# EAGLE board PlytkaProcesor (EAGLE 9.7.0)
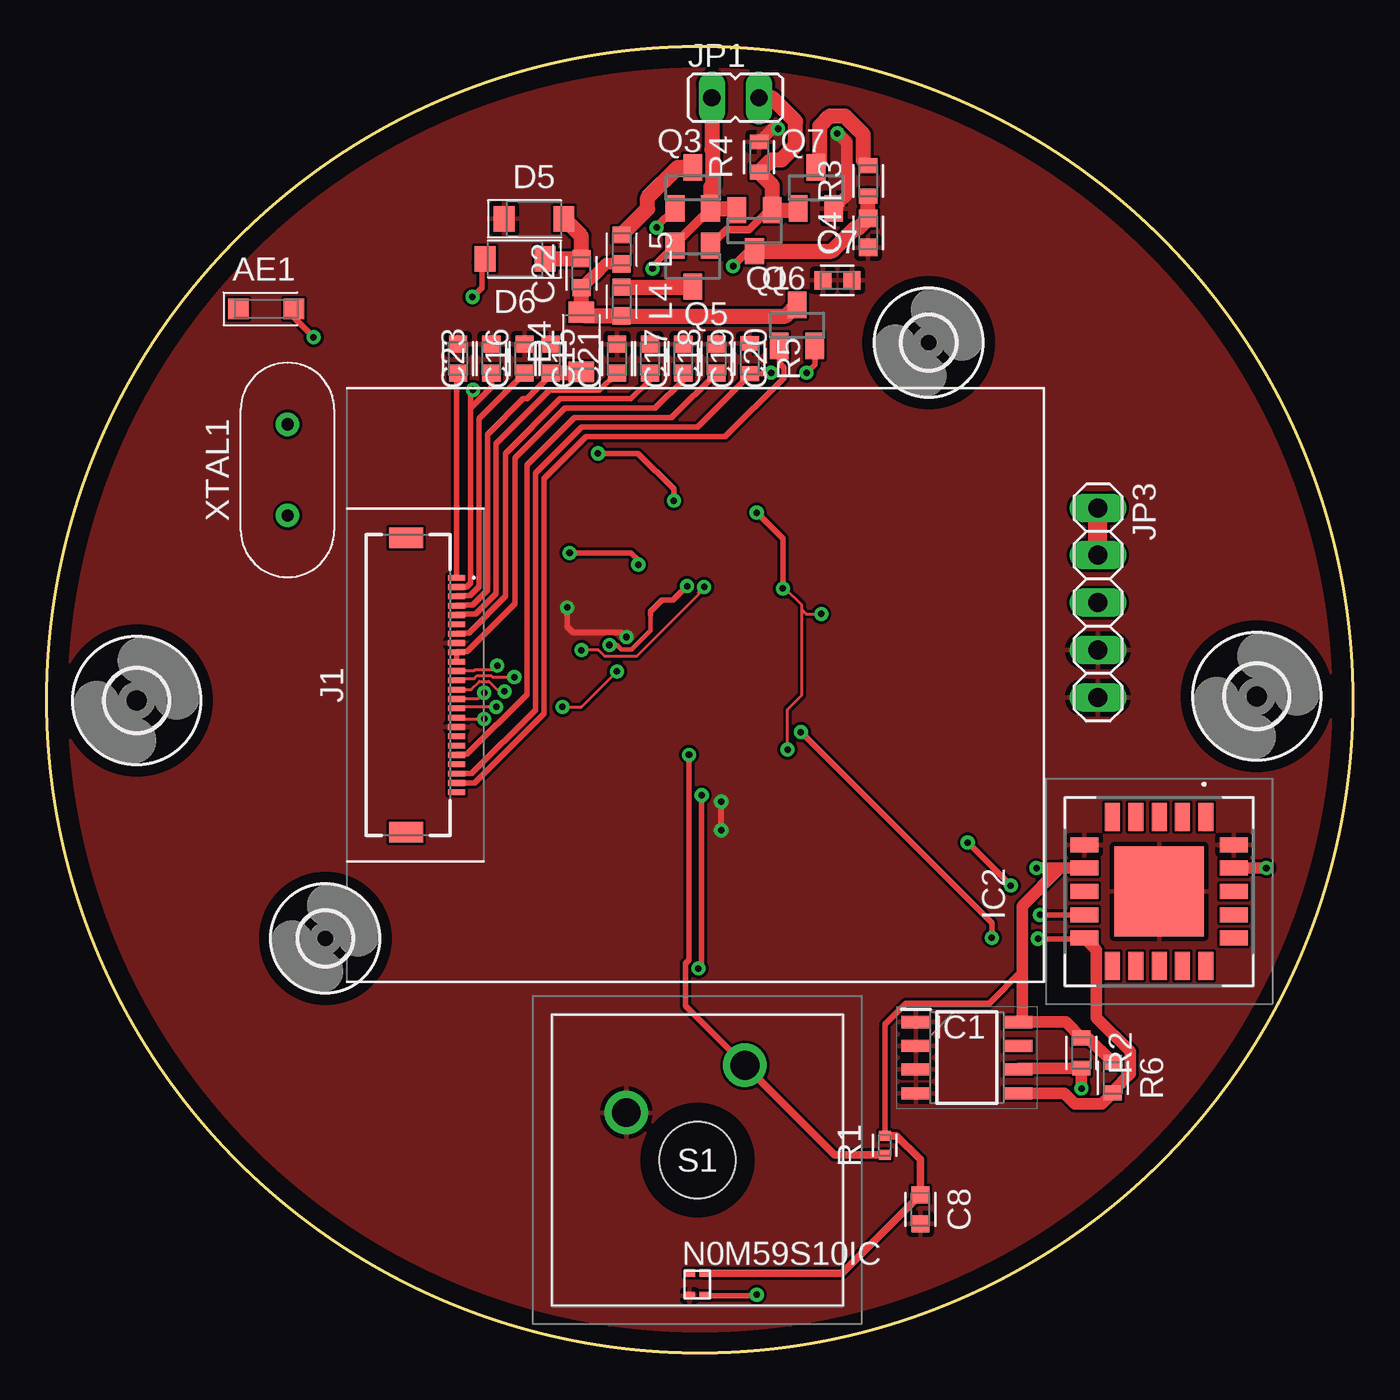
[diagram p0: board, top side]
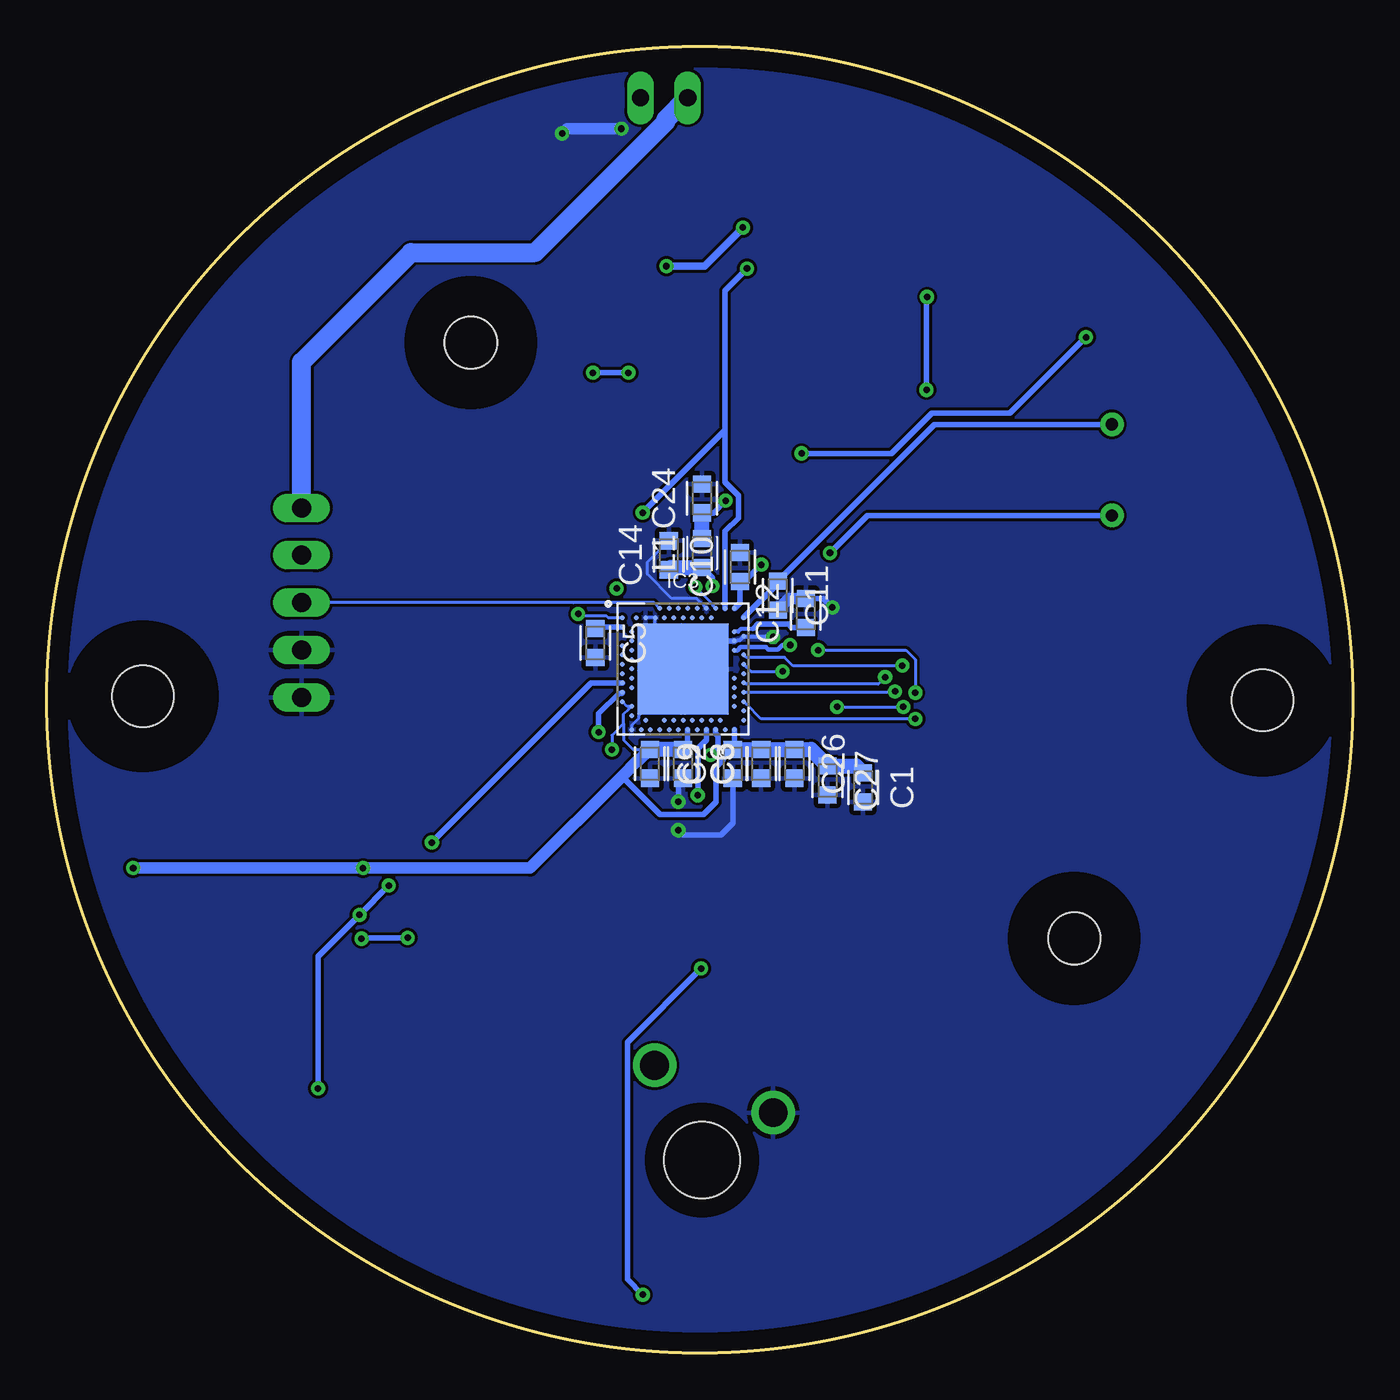
[diagram p1: board, bottom side, seen from below]

Size 70 x 70 mm. Coordinates in mm from the lower left corner, seen from the top.
Outline: circle at 35,35 radius 35
Copper layers (1*16): Top 0.035mm / dielectric 1.5mm / Bottom 0.035mm
Design rules "default": minimum track width 6mil, minimum drill 0.35mm, track to track 6mil, track to pad 6mil, pad to pad 6mil, via to via 6mil, smd to smd 6mil, copper to edge 40mil, drill to drill 6mil, minimum pad ring 10mil, minimum via ring 8mil, stop-mask expansion 4mil, vias tented up to drill 0mil, thermal gap 10mil

## Footprints (pad centres in the part's own frame; a part is rotated, then mirrored left to right if it is on the bottom)
ANT-GPS-3.2X1MM = smd 1.1 x 1.112: 1 -1.485,0; 2 1.485,0
CAPC1608X85 = smd 0.921 x 0.97: 1 -0.775,0; 2 0.775,0
SODFL3718X115 = smd 1.115 x 1.361: 1 -1.6,0; 2 1.6,0
3,3 = hole 3.3: 0,0
2,8 = hole 2.8: 0,0
SOIC127P602X173-8N = smd 1.551 x 0.65: 1 -2.725,1.905; 2 -2.725,0.635; 3 -2.725,-0.635; 4 -2.725,-1.905; 5 2.725,-1.905; 6 2.725,-0.635; 7 2.725,0.635; 8 2.725,1.905
SCD40DR1 = smd 1.5 x 0.8: 1 -4,2.5; 2 -4,1.25; 3 -4,0; 4 -4,-1.25; 5 -4,-2.5; 11 4,-2.5; 12 4,-1.25; 13 4,0; 14 4,1.25; 15 4,2.5 | smd 0.8 x 1.5: 6 -2.5,-4; 7 -1.25,-4; 8 0,-4; 9 1.25,-4; 10 2.5,-4; 16 2.5,4; 17 1.25,4; 18 0,4; 19 -1.25,4; 20 -2.5,4 | smd 4.8 x 4.8: 21 0,0
NRF52840-QIAA = smd 4.85 x 4.85: 74 0,0 | smd 0.275 x 0.275: A8 -1.25,3.25; A10 -0.75,3.25; A12 -0.25,3.25; A14 0.25,3.25; A16 0.75,3.25; A18 1.25,3.25; A20 1.75,3.25; A22 2.25,3.25; A23 2.75,3.25; AA24 3.25,-2.25; AB2 -2.75,-2.5; AC5 -2,-2.75; AC9 -1,-2.75; AC11 -0.5,-2.75; AC13 0,-2.75; AC15 0.5,-2.75; AC17 1,-2.75; AC19 1.5,-2.75; AC21 2,-2.75; AC24 3.25,-2.75; AD2 -2.75,-3.25; AD4 -2.25,-3.25; AD6 -1.75,-3.25; AD8 -1.25,-3.25; AD10 -0.75,-3.25; AD12 -0.25,-3.25; AD14 0.25,-3.25; AD16 0.75,-3.25; AD18 1.25,-3.25; AD20 1.75,-3.25; AD22 2.25,-3.25; AD23 2.75,-3.25; B1 -3.25,2.75; B3 -2.5,2.75; B5 -2,2.75; B7 -1.5,2.75; B9 -1,2.75; B11 -0.5,2.75; B13 0,2.75; B15 0.5,2.75; B17 1,2.75; B19 1.5,2.75; B24 3.25,2.75; C1 -3.25,2.25; D2 -2.75,2; D23 2.75,2; E24 3.25,1.75; F2 -2.75,1.5; F23 2.75,1.5; G1 -3.25,1.25; H2 -2.75,1; H23 2.75,1; J1 -3.25,0.75; J24 3.25,0.75; K2 -2.75,0.5; L1 -3.25,0.25; L24 3.25,0.25; M2 -2.75,0; N1 -3.25,-0.25; N24 3.25,-0.25; P2 -2.75,-0.5; P23 2.75,-0.5; R1 -3.25,-0.75; R24 3.25,-0.75; T2 -2.75,-1; T23 2.75,-1; U1 -3.25,-1.25; U24 3.25,-1.25; V23 2.75,-1.5; W1 -3.25,-1.75; W24 3.25,-1.75; Y2 -2.75,-2; Y23 2.75,-2
F34G1A7Q1E8C24 = smd 0.3 x 0.9: 1 -5.75,2.425; 2 -5.25,2.425; 3 -4.75,2.425; 4 -4.25,2.425; 5 -3.75,2.425; 6 -3.25,2.425; 7 -2.75,2.425; 8 -2.25,2.425; 9 -1.75,2.425; 10 -1.25,2.425; 11 -0.75,2.425; 12 -0.25,2.425; 13 0.25,2.425; 14 0.75,2.425; 15 1.25,2.425; 16 1.75,2.425; 17 2.25,2.425; 18 2.75,2.425; 19 3.25,2.425; 20 3.75,2.425; 21 4.25,2.425; 22 4.75,2.425; 23 5.25,2.425; 24 5.75,2.425 | smd 1.1 x 1.8: MP1 -7.9,-0.275; MP2 7.9,-0.275
JP1 = drill 0.914 long: 1 0,-1.27; 2 0,1.27
1X05 = drill 1.016 long: 1 -5.08,0; 2 -2.54,0; 3 0,0; 4 2.54,0; 5 5.08,0
INDC1608X95N = smd 0.9 x 0.97: 1 -0.785,0 | smd 0.933 x 0.97: 2 0.769,0
SOT23 = smd 1 x 1.4: 1 -0.95,-1.1; 2 0.95,-1.1; 3 0,1.1
RESC1005X40 = smd 0.535 x 0.644: 1 -0.507,0; 2 0.507,0
RESC1608X60 = smd 0.799 x 0.974: 1 -0.815,0; 2 0.815,0
MX1AC1NN = drill 1.549 pad 2.324: 1 0,0; 2 6.35,2.54 | hole 4.089: 3.81,-2.54
N0M59S10IC = smd 0.55 x 0.4: DIN 1.15,0.2; DOUT 0.34,1.4; VDD 1.15,1.4; VSS 0.34,0.2
XTALRR488W45L1150T500H350B = drill 0.657 pad 1.257: 1 -2.44,0; 2 2.44,0

## Placement (x,y rotation side)
AE1  AH316  [ANT-GPS-3.2X1MM]  11.77,55.95 0 top
C1  4.7uF  [CAPC1608X85]  26.24,30.3 270 bottom
C2  4.7uF/25V  [CAPC1608X85]  33.23,31.57 90 bottom
C3  100nF/25V  [CAPC1608X85]  31.71,31.57 90 bottom
C4  100nF/25V  [CAPC1608X85]  44.02,60.02 90 top
C5  100nF  [CAPC1608X85]  40.6,38.04 270 bottom
C6  1uF  [CAPC1608X85]  35.9,31.57 270 bottom
C7  1uF  [CAPC1608X85]  42.37,57.48 0 top
C8  0.1uF  [CAPC1608X85]  46.82,7.69 270 top
C9  100nF  [CAPC1608X85]  37.67,31.57 270 bottom
C10  12pF  [CAPC1608X85]  32.85,42.11 90 bottom
C11  12pF  [CAPC1608X85]  30.82,40.58 270 bottom
C12  100pF  [CAPC1608X85]  29.32,39.64 90 bottom
C14  0.8pF  [CAPC1608X85]  36.66,42.74 90 bottom
C15  1uF/25V  [CAPC1608X85]  25.61,53.28 270 top
C16  1uF/25V  [CAPC1608X85]  22.05,53.28 270 top
C17  1uF/25V  [CAPC1608X85]  30.56,53.28 270 top
C18  1uF/25V  [CAPC1608X85]  32.34,53.28 270 top
C19  1uF/25V  [CAPC1608X85]  34.12,53.28 270 top
C20  1uF/25V  [CAPC1608X85]  35.9,53.28 270 top
C21  4.7uF/25V  [CAPC1608X85]  27.01,53.28 270 top
C22  4.7uF/25V  [CAPC1608X85]  28.66,57.86 90 top
C23  1uF/25V  [CAPC1608X85]  23.83,53.28 90 top
C24  0.5pF  [CAPC1608X85]  34.88,45.79 90 bottom
C26  100nF  [CAPC1608X85]  29.93,31.57 270 bottom
C27  100nF  [CAPC1608X85]  28.15,30.68 270 bottom
D4  MBR0520LT1G  [SODFL3718X115]  28.66,54.17 90 top
D5  MBR0520LT1G  [SODFL3718X115]  26.12,60.78 0 top
D6  MBR0520LT1G  [SODFL3718X115]  25.1,58.62 180 top
H1  MOUNT-HOLE3.3  [3,3]  4.83,34.97 0 top
H2  MOUNT-HOLE3.3  [3,3]  64.85,35.19 0 top
H3  MOUNT-HOLE2.8  [2,8]  14.93,22.21 0 top
H4  MOUNT-HOLE2.8  [2,8]  47.27,54.14 0 top
IC1  FM24CL64B-GTR  [SOIC127P602X173-8N]  49.31,15.82 0 top
IC2  SCD40-D-R1  [SCD40DR1]  59.62,24.73 270 top
IC3  NRF52840-QIAA-R  [NRF52840-QIAA]  35.9,36.65 0 bottom
J1  F34G-1A7Q1-E8C24  [F34G1A7Q1E8C24]  19.54,35.79 270 top
JP1  [JP1]  36.91,67.25 270 top
JP3  PINHD-1X5  [1X05]  56.34,40.2 270 top
L1  4.7nH  [INDC1608X95N]  34.88,42.87 90 bottom
L4  10uH  [INDC1608X95N]  30.82,56.33 270 top
L5  47uH  [INDC1608X95N]  30.82,59.13 270 top
Q1  PMOSFET  [SOT23]  37.93,60.14 180 top
Q3  PMOSFET  [SOT23]  34.63,62.43 0 top
Q5  PMOSFET  [SOT23]  34.63,58.24 180 top
Q6  NMOSFET  [SOT23]  40.22,55.06 0 top
Q7  NMOSFET  [SOT23]  41.23,62.43 0 top
R1  4k7  [RESC1005X40]  44.91,11.12 90 top
R2  10k  [RESC1608X60]  55.45,16.07 270 top
R3  33K  [RESC1608X60]  44.02,62.81 90 top
R4  33K  [RESC1608X60]  38.18,64.08 90 top
R5  0.47R  [RESC1608X60]  37.67,53.28 270 top
R6  10k  [RESC1608X60]  57.14,14.74 270 top
S1  MX1A-C1NN  [MX1AC1NN]  31.06,12.87 0 top
U$1  N0M59S10IC  [N0M59S10IC]  34.12,2.87 0 top
XTAL1  HC49  [XTALRR488W45L1150T500H350B]  12.91,47.32 90 top

## Library data of the parts
AE1 = RF_Wireless; CATEGORY: Antenna; DESCRIPTION: Antenna SURF MOUNT ANTENNA RADIEDGE; MANUFACTURER: Taiyo Yuden; MPN: AH316M245001-T; OPERATING_TEMPERATURE: - 40 C to +85 C; ROHS_COMPLIANT: COMPLIANT; SERIES: AH; SUB_CATEGORY: Antenna; TYPE: 2.4GHz Antenna - 2.4GHz, 5GHz, Bluetooth, WiFi, WLAN, Zigbee
C1-C12 C14-C24 C26 C27 = Capacitor; CATEGORY: Capacitor
D4-D6 = Diode; CATEGORY: Diode; DESCRIPTION: DIODE SCHOTTKY 20V 500MA SOD123; MANUFACTURER: ON Semiconductor; MPN: MBR0520LT1G; SUB-CATEGORY: Schottky
H1-H4 = holes
IC1 = SamacSys_Parts; DESCRIPTION: CYPRESS - INFINEON TECHNOLOGIES - FM24CL64B-GTR - Ferroelectric RAM (FRAM), 64 Kbit (8K x 8) I2C, 1 MHz, 2.7 V to 3.65 V Supply, SOIC-8; HEIGHT: 1.727mm; MANUFACTURER_NAME: Infineon; MANUFACTURER_PART_NUMBER: FM24CL64B-GTR; MOUSER_PART_NUMBER: 877-FM24CL64B-GTR; MOUSER_PRICE-STOCK: https://www.mouser.co.uk/ProductDetail/Infineon-Technologies/FM24CL64B-GTR?qs=pA5MXup5wxFBNKAQkjzmOA%3D%3D
IC2 = SamacSys_Parts; DESCRIPTION: Breaking the size barrier in CO2 sensing; HEIGHT: 6.8mm; MANUFACTURER_NAME: Sensirion; MANUFACTURER_PART_NUMBER: SCD40-D-R1; MOUSER_PART_NUMBER: 403-SCD40-D-R1; MOUSER_PRICE-STOCK: https://www.mouser.co.uk/ProductDetail/Sensirion/SCD40-D-R1?qs=HBWAp0VN4RjvSDpwiC%2F4pQ%3D%3D
IC3 = IC_Wireless-RF; CATEGORY: IC_Wireless-RF; DESCRIPTION: Bluetooth ® 5, IEEE 802.15.4-2006, 2.4 GHz transceiver; FREQUENCY: 64MHz; IO: 48; MANUFACTURER: Nordic Semiconductor; MPN: nRF52840-QIAA-R; PART_STATUS: Active; ROHS_COMPLIANT: COMPLIANT; SERIES: nRF52840; SUB-CATEGORY: Bluetooth
J1 = Biblioteka; DESCRIPTION: 24 Position FPC Connector Contacts, Bottom 0.020" (0.50mm) Surface Mount, Right Angle; HEIGHT: 1.75mm; MANUFACTURER_NAME: Amphenol; MANUFACTURER_PART_NUMBER: F34G-1A7Q1-E8C24; MOUSER_PART_NUMBER: 649-F34G1A7Q1E8C24; MOUSER_PRICE-STOCK: https://www.mouser.co.uk/ProductDetail/Amphenol-Aorora/F34G-1A7Q1-E8C24?qs=11PymoJGorK92cO6qHcfCw%3D%3D
JP1 = jumper
JP3 = Connector; CATEGORY: Headers; DESCRIPTION: Header, Straight, 5 Position; MANUFACTURER: Generic; MPN: Generic; OPERATING_TEMPERATURE: Generic; PART_STATUS: Active; PITCH: 0.100" (2.54mm); ROHS_COMPLIANCE: Generic; SERIES: Generic; SUB-CATEGORY: Headers, Male Pins; TYPE: Board to Board or Cable, Unshrouded, Through Hole, Straight
L1 L4 L5 = Inductor; CATEGORY: Inductor; SUB-CATEGORY: Fixed
Q1 Q3 Q5 = Transistor; CATEGORY: Transistor; SUB-CATEGORY: MOSFET; TYPE: P-Channel
Q6 Q7 = Transistor; CATEGORY: Transistor; SUB-CATEGORY: MOSFET; TYPE: N-Channel
R1-R6 = Resistor; CATEGORY: Resistor; SUB-CATEGORY: Fixed
S1 = SamacSys_Parts; DESCRIPTION: Pushbutton Switches Full Travel, Mech. Keyswitch Tactile Feel (Clear stem), 65cN No LED, No Diode Frame Mount (no fixation pins); HEIGHT: 15.2mm; MANUFACTURER_NAME: Cherry; MANUFACTURER_PART_NUMBER: MX1A-C1NN; MOUSER_PART_NUMBER: 540-MX1A-C1NN; MOUSER_PRICE-STOCK: https://www.mouser.co.uk/ProductDetail/CHERRY/MX1A-C1NN?qs=Z9t1pRjfOcwvorA009Lo0w%3D%3D
U$1 = N0M59S10IC
XTAL1 = Frequency-Source; CATEGORY: Frequency-Source; SUB-CATEGORY: Crystal-2Pin

## Nets
3V3: C1.1 C2.2 C3.2 C6.1 C8.1 C9.1 C26.1 C27.1 IC1.8 IC2.7 IC2.19 IC3.A22 IC3.AD14 IC3.AD23 IC3.B1 IC3.W1 IC3.Y2 JP1.1 JP3.1 JP3.2 Q1.2 Q3.2 Q5.2 R1.2 R2.1 R6.1 U$1.VDD
BUSY: IC3.W24 J1.16
CS: IC3.U24 J1.13
D0: IC3.AD20 R1.1 S1.2
D1: IC3.A8 JP3.3
D2: IC3.AD18 U$1.DIN
D/C: IC3.A20 J1.14
DCC: IC3.B3
DCCH: IC3.AB2
DEC5: IC3.N24
DECUSB: IC3.AC5
GND: C1.2 C2.1 C3.1 C4.1 C5.2 C6.2 C7.1 C7.2 C8.2 C9.2 C10.2 C11.2 C12.2 C14.2 C15.1 C16.1 C17.1 C18.1 C19.1 C20.1 C21.1 C23.2 C24.2 C26.2 C27.2 D5.1 IC1.1 IC1.2 IC1.3 IC1.4 IC2.6 IC2.20 IC2.21 IC3.74 IC3.A18 IC3.AD2 IC3.B5 IC3.B7 IC3.E24 IC3.F23 J1.8 J1.17 JP3.4 JP3.5 Q7.2 R4.2 R5.1 S1.1 U$1.VSS
INDUCTOR_SEL: JP1.2 Q1.1 Q5.1 Q7.1 R4.1
L1: L5.1 Q3.3
L2: L4.1 Q5.3
MISO: IC3.P2
MOSI: IC3.J24 J1.11
N$3: C11.1 IC3.B24 XTAL1.2
N$4: C4.2 Q1.3 Q3.1 R3.1
N$5: C16.2 J1.1
N$6: C15.2 J1.3
N$7: C17.2 J1.5
N$8: C18.2 J1.7
N$9: C10.1 IC3.A23 XTAL1.1
N$10: C19.2 J1.9 J1.10
N$11: Q7.3 R3.2
N$12: C20.2 J1.20
N$13: J1.23 Q6.1
N$14: J1.22 Q6.2 R5.2
N$15: C21.2 D4.1 J1.4
N$16: C22.1 D4.2 L4.2 L5.2 Q6.3
N$17: C22.2 D5.2 D6.1
N$18: C14.1 IC3.H23 L1.1
N$19: C12.1 IC3.D23
N$20: AE1.2 C24.1 L1.2
N$22: C5.1 IC3.C1
RST: IC3.L24 J1.15
SCK: IC3.R24 J1.12
SCL: IC1.6 IC2.9 IC3.R1 R2.2
SDA: IC1.5 IC2.10 IC3.U1 R6.2
VGL: C23.1 D6.2 J1.2
VPP: J1.6

## Tracks (layer width: path | path; a pad name or v marks a point on that pad's centre or on a via)
3V3  (via drill 0.35, 0.35 pad 0.5)
  Top 0.152: v39.71,32.33 39.71,34.49 40.47,35.25 40.47,39.82 | 40.47,39.82 40.47,40.08 39.58,40.97 v39.45,40.97 | 40.47,39.82 40.69,39.6 v41.51,39.6
  Top 0.305: v38.06,45.03 39.45,43.63 v39.45,40.97 | v32.47,58.11 32.47,58.22 33.68,59.43 | 52.29,20.52 50.51,18.74 46.06,18.74 44.91,17.6 R1.2
  Top 0.406: R1.2 45.55,11.63 46.82,10.36 C8.1 42.62,4.27 U$1.VDD
  Top 0.508: Q3.2 33.68,59.43 Q5.2
  Top 0.61: R6.1 55.8,16.89 R2.1 54.62,17.72 IC1.8 52.29,17.98 52.29,20.52 52.29,23.96 54.31,25.98 IC2.7 v53.05,25.98 v53.04,25.98 | v65.36,25.98 IC2.19
  Top 0.813: Q1.2 36.89,61.33 Q3.2 35.58,62.49 35.69,62.6 35.69,64.46 35.64,64.5 JP1.1
  Top 1.016: JP3.2 JP3.1
  Bottom 0.152: IC3.W1 38.9,34.65 IC3.Y2 38.78,34.51 38.8,34.51 39.07,34.24 39.07,33.73 | 39.07,33.73 39.07,32.84 38.58,32.34 C9.1 | 39.07,33.73 39.71,33.09 v39.71,32.33 | IC3.B1 39.91,39.4 40.02,39.51 41.42,39.51 v41.51,39.6
  Bottom 0.305: IC3.AD23 33.15,32.43 C2.2 33.74,31.83 33.74,31.77 34.12,31.39 34.12,29.54 34.8,28.85 37.12,28.85 39.16,30.9 | IC3.AD14 35.65,32.59 C6.1 | v38.06,45.03 33.65,49.44 | 33.65,49.44 33.65,56.93 v32.47,58.11 | IC3.A22 33.65,40.6 33.64,40.61 33.64,44.04 32.93,44.75 32.93,45.95 33.65,46.67 33.65,49.44
  Bottom 0.61: C9.1 38.31,31.71 38.35,31.71 39.16,30.9 44.08,25.98 v53.05,25.98 v65.36,25.98
  Bottom 0.813: C1.1 26.63,31.45 C27.1 29.04,32.34 C26.1 C3.2 C2.2 | C6.1 C9.1
  Bottom 1.016: JP3.1 56.34,53.09 50.48,58.96 43.82,58.96 36.81,65.98 36.81,66.09 JP1.1
BUSY  (via drill 0.35)
  Top 0.152: J1.16 22.03,33.98 v23.44,33.98 v23.44,33.97
  Bottom 0.152: IC3.W24 32.51,34.76 32.49,34.76 31.71,33.98 23.45,33.98 v23.44,33.97
CS  (via drill 0.35)
  Top 0.152: v24.54,35.45 24.24,35.45 23.7,35.98 23.2,35.98 22.76,35.54 J1.13
  Bottom 0.152: v24.54,35.45 24.59,35.4 IC3.U24
D0  (via drill 0.35)
  Top 0.305: v34.42,32.05 34.42,21.06 34.25,20.88 34.25,18.58 37.53,15.3
  Top 0.406: R1.1 42.22,10.61 37.53,15.3 S1.2
  Bottom 0.305: IC3.AD20 34.15,33.2 34.02,33.07 34.02,32.35 34.32,32.05 v34.42,32.05
D1
  Bottom 0.152: JP3.3 41.77,40.2 37.45,40.2 IC3.A8
D2  (via drill 0.35)
  Top 0.305: v35.11,29.89 35.11,20.78 v34.93,20.6 | v38.06,3.12 38,3.07 U$1.DIN
  Bottom 0.305: IC3.AD18 34.65,32.86 35.11,32.4 v35.11,29.89 | v34.93,20.6 38.88,16.65 38.88,3.94 v38.06,3.12
D/C  (via drill 0.35 pad 0.5)
  Top 0.152: v23.45,35.38 23.11,35.04 J1.14 | v28.66,37.66 29.57,37.66 29.91,37.33 31.62,37.33 34.93,40.64 34.93,40.74 v35.23,41.04
  Bottom 0.152: IC3.A20 34.28,40.03 34.28,40.09 v35.23,41.04 | v28.66,37.66 23.96,37.66 23.45,37.16 v23.45,35.38
GND  (via drill 0.35)
  Top 0.203: v31.07,38.36 30.82,38.62
  Top 0.305: v27.9,39.95 27.9,38.93 28.21,38.62 30.82,38.62 | v36.15,29.54 v36.15,28.01
  Top 0.61: v42.37,65.35 42.88,64.84 42.88,62.03 Q7.2 | R4.2 38.66,65.37 38.67,65.37 38.9,65.6 v39.2,65.6
  Bottom 0.152: 34.25,38.17 35.83,36.58 | 35.83,36.58 38.28,34.14 38.28,34 38.65,33.63 IC3.AD2 | 35.83,36.58 37.4,38.15 IC3.B7 IC3.B5 | IC3.A18 34.78,40.03 34.78,40.05 35.17,40.43 36.51,40.43 37.8,41.73 37.8,42.38 C14.2
  Bottom 0.203: IC3.F23 33.02,38.15 32.98,38.2 32.85,38.2 IC3.E24 31.45,38.4 31.41,38.36 v31.07,38.36
  Bottom 0.305: IC3.F23 34.22,38.15 34.25,38.17 | C12.2 28.37,40.42 v27.9,39.95 | C6.2 36.15,30.54 v36.15,29.54 | v36.15,28.01 35.9,27.76 33.87,27.76 33.23,28.39 C2.1
  Bottom 0.61: C12.2 30.21,40.42 C11.2 | v42.37,65.35 42.12,65.6 v39.2,65.6
  pour Bottom: -0.48,-0.11 70.11,-0.11 70.11,69.97 -0.48,69.97
  pour Top: 70.11,-0.11 70.11,69.97 -0.48,69.97 -0.48,-0.11
INDUCTOR_SEL
  Top 0.406: Q5.1 36.43,60.19 37.63,60.19 38.68,61.24 Q1.1
  Top 0.813: Q7.1 40.2,61.24 Q1.1 38.88,62.57 R4.1 38.86,63.94 39.39,63.94 40.14,64.69 40.14,65.99 38.87,67.25 JP1.2
L1
  Top 0.813: L5.1 32.21,61.31 32.21,61.92 33.82,63.53 Q3.3
L2
  Top 0.813: L4.1 34.61,57.12 Q5.3
MOSI  (via drill 0.35 pad 0.5)
  Top 0.152: v24.14,36.83 23.91,36.59 22.95,36.59 22.89,36.54 J1.11
  Bottom 0.152: IC3.J24 32.51,37.26 30.45,37.26 30,36.82 24.16,36.82 v24.14,36.83
N$3
  Bottom 0.305: XTAL1.2 22.42,49.76 C11.1 30.82,41.23 IC3.B24
N$4  (via drill 0.35)
  Top 0.406: Q3.1 32.72,60.37 32.72,60.33 v32.69,60.3 | v36.79,58.24 37.59,59.04 Q1.3
  Top 0.813: R3.1 C4.2 43.49,60.26 43.31,60.26 42.09,59.04 Q1.3
  Bottom 0.406: v32.69,60.3 34.75,58.24 v36.79,58.24
N$5
  Top 0.305: J1.1 21.97,52.42 C16.2
N$6
  Top 0.305: C15.2 23.18,50.08 23.18,41.07 22.69,40.58 22.01,40.58 J1.3
N$7
  Top 0.305: J1.5 22.01,39.58 22.98,39.58 24.09,40.7 24.09,48.72 26.96,51.58 29.64,51.58 C17.2
N$8
  Top 0.305: J1.7 22.01,38.59 22.63,38.59 24.59,40.55 24.59,48.2 27.52,51.13 31.32,51.13 32.34,52.14 C18.2
N$9  (via drill 0.35)
  Top 0.305: v28.02,42.87 31.31,42.87 31.71,42.48 v31.71,42.24
  Bottom 0.305: IC3.A23 32.85,40.2 C10.1 32.61,41.33 v31.71,42.24 | XTAL1.1 26.02,44.88 v28.02,42.87
N$10
  Top 0.305: C19.2 34.12,52.14 32.59,50.62 27.77,50.62 25.1,47.95 25.1,40.15 22.54,37.59 22.01,37.59 J1.9 J1.10
N$11
  Top 0.813: Q7.3 41.44,63.73 41.44,65.74 41.99,66.29 42.76,66.29 43.75,65.3 43.75,63.9 R3.2
N$12
  Top 0.305: J1.20 22.01,32.09 22.54,32.09 25.74,35.29 25.74,47.58 28.28,50.11 33.5,50.11 C20.2
N$13
  Top 0.305: J1.23 22.93,30.54 26.66,34.27 26.66,46.84 28.91,49.09 36.35,49.09 39.5,52.24 39.5,52.81 39.27,53.04 Q6.1
N$14  (via drill 0.35)
  Top 0.305: J1.22 22.79,31.04 26.2,34.46 26.2,47.15 28.66,49.6 34.88,49.6 37.67,52.4 R5.2 38.77,52.47 v38.82,52.52 | v40.72,52.52 41.16,52.96 Q6.2
  Bottom 0.305: v38.82,52.52 v40.72,52.52
N$15
  Top 0.305: J1.4 22.01,40.08 22.83,40.08 23.63,40.89 23.63,49.22 25.54,51.13 25.74,51.13 27.01,52.4 C21.2
  Top 0.813: C21.2 28.59,52.51 D4.1
N$16
  Top 0.61: C22.1 29.29,57.71 29.33,57.71 29.98,58.36 L5.2
  Top 0.813: C22.1 D4.2 28.87,55.56 L4.2 39.62,55.56 Q6.3
N$17
  Top 0.813: D6.1 26.71,58.63 C22.2 28.66,59.84 D5.2
N$18  (via drill 0.35)
  Top 0.254: 32.36,39.56 32.36,38.72 31.34,37.7 30.8,37.7 30.57,37.93 v30.16,37.93
  Top 0.305: v34.32,41.09 33.56,40.33 32.98,40.33 32.36,39.71 32.36,39.56
  Bottom 0.254: IC3.H23 32.99,37.65 32.82,37.81 31.45,37.81 31.34,37.7 30.8,37.7 30.57,37.93 v30.16,37.93
  Bottom 0.305: L1.1 34.32,41.53 v34.32,41.09
  Bottom 0.813: C14.1 36.54,42.09 L1.1
N$19
  Bottom 0.203: IC3.D23 32.95,38.65 32.81,38.79 32.16,38.79 32.1,38.84
  Bottom 0.305: C12.1 30.07,38.87 30.25,39.04 31.9,39.04 32.1,38.84
N$20  (via drill 0.35)
  Top 0.305: v29.55,48.2 31.69,48.2 33.61,46.29 v33.61,45.66 | v14.31,54.43 13.25,55.48 AE1.2
  Bottom 0.305: v29.55,48.2 24.72,48.2 22.56,50.36 18.37,50.36 v14.31,54.43 | v33.61,45.66 34.26,45.02 C24.1
  Bottom 0.813: L1.2 34.94,43.69 34.88,43.75 C24.1
N$22
  Bottom 0.305: IC3.C1 40.52,38.9 C5.1
RST  (via drill 0.35 pad 0.5)
  Top 0.152: v30.56,36.52 28.66,34.62 v27.64,34.62 | v24.09,34.62 22.04,34.62 J1.15
  Bottom 0.152: IC3.L24 32.51,36.76 32.49,36.76 32.25,36.52 v30.56,36.52 | v27.64,34.62 v24.09,34.62
SCK  (via drill 0.35)
  Top 0.152: J1.12 22.06,36.13 22.92,36.13 23.07,36.29 23.83,36.29 23.91,36.21 v25.06,36.21
  Bottom 0.152: IC3.R24 32.56,35.9 32.51,35.84 25.43,35.84 v25.06,36.21
SCL  (via drill 0.35)
  Top 0.305: v49.36,27.35 v51.67,25.04 | IC2.9 v53.23,23.48
  Top 0.61: v55.45,14.17 R2.2 52.11,15.26 IC1.6
  Bottom 0.305: IC3.R1 40.81,35.9 v49.36,27.35 | v51.67,25.04 v53.23,23.48 55.45,21.26 v55.45,14.17
SDA  (via drill 0.35)
  Top 0.305: v40.42,33.27 50.65,23.03 v50.65,22.25 | IC2.10 55.59,22.19 v53.13,22.19
  Top 0.61: IC2.10 56.27,21.58 56.27,17.96 58.08,16.14 58.08,14.97 57.14,14.02 R6.2 56.54,13.33 55.11,13.33 54.53,13.91 IC1.5
  Bottom 0.305: IC3.U1 39.2,35.34 39.33,35.34 40.42,34.25 v40.42,33.27 | v50.65,22.25 52.97,22.25 53.02,22.19 v53.13,22.19
VGL  (via drill 0.35)
  Top 0.305: J1.2 22.5,41.04 22.72,41.26 22.72,50.64 | 22.72,50.64 23.83,51.75 C23.1 | 22.72,50.64 22.72,51.48 v22.84,51.6 | v22.82,56.59 23.32,57.09 23.32,58.44
  Top 0.813: 23.32,58.44 D6.2
  Bottom 0.305: v22.84,51.6 22.84,56.56 v22.82,56.59
(copper drawn outside any net)
  shapes: Bottom area x1, Top area x1